# Altium PCB Cuttomized_Industrial_controller.PcbDoc (part 2 of 2)
Units mil, origin at the board's own origin, x right, y up, seen from the top; angles counter-clockwise.
Board outline 5820 x 4455 mil, 2 copper layers (Top Layer, Bottom Layer); 131 components, 106 nets, 448 pads, 121 vias.
Unrouted connection lines stored in the file: 64.
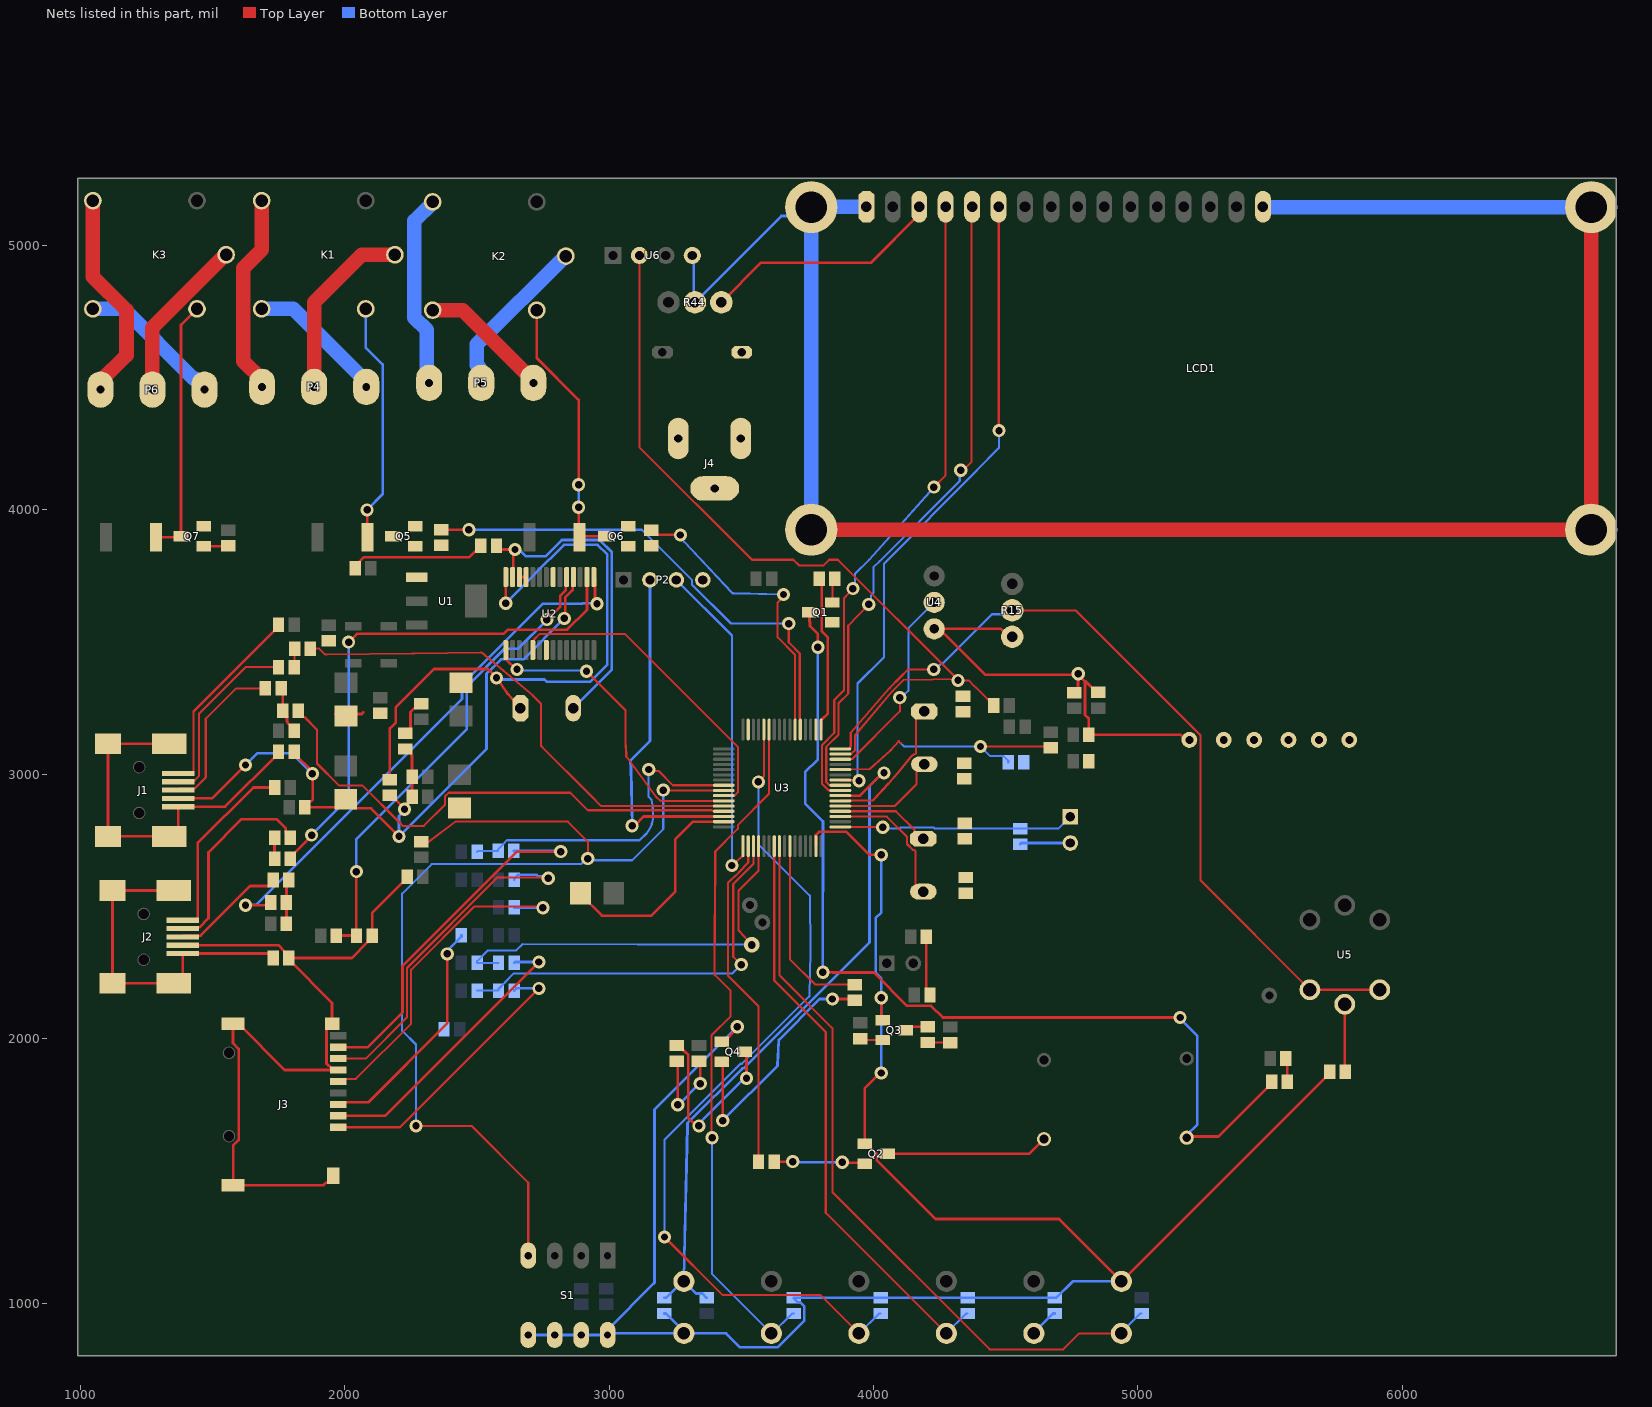
[diagram p2: the nets of this part, all layers, seen from the top]

## Via types
v1: diameter 50, hole 28, Top Layer to Bottom Layer, 121 vias

## Nets (pads, with @x,y where several pads share a name; then routed paths per layer and width w, separated by ;. In a path a pad name is that pad's centre, name@x,y a point inside that pad or via, vN(x,y) a via of type N, cw(c..) or ccw(c..) an arc to the next point about the centre after c; other vN are vias at no path point) (continued)
DATA_1: R23.2 R24.1 U3.40 | length 1235.7
  Top Layer w8: v1(3150,3018) 3154.96,3013.04 3187,3013.04 3241.61,2958.43 U3.40@3434.06,2958.43
  Bottom Layer w8: R23.2@2501.03,2706.67 2504.36,2710 R24.1@2580.47,2710 2580.47,2715.91 2605.87,2741.31 2605.87,2742.53 2613.62,2750.28 3115.28,2750.28 3125,2760 3134.24,2768.49 ccw(c3067.59,2840.99) 3166.05,2843.03 3166.05,2843.12 3165.32,2882.31 3159.98,2904.49 3157.64,2906.83 3148.84,2915.64 3148.84,3016.84 v1(3150,3018)
DATA_2: R19.2 R34.1 U3.51 | length 1536
  Top Layer w8: v1(3500,2280) 3470,2310 3470,2585 3546.26,2661.26 U3.51@3546.26,2728.11
  Bottom Layer w8: R19.2@2501.03,2181.67 R34.1@2581.98,2181.67 2581.98,2187.57 2607.38,2212.98 2607.38,2214.2 2640.29,2247.11 3467.11,2247.11 v1(3500,2280)
DATA_3: pad.2 R20.2 R33.1 U3.52 | length 1576.4
  Top Layer w8: pad.2@3540,2355 3490,2410.61 3490,2560 3565.94,2635.94 U3.52@3565.94,2728.11
  Bottom Layer w8: R33.1@2581.98,2286.67 R20.2@2501.03,2286.67 2501.03,2292.57 2542.57,2334.11 2649.66,2334.11 2672.93,2357.39 pad.2@3540,2355
DC_IN: J4.4 SW7.2
Direction: R37.1 SW4.1 U3.55 | length 2224.7
  Top Layer w8: U3.55@3625,2728.11 3625,2219.95 3820,2024.94 3820,1341.38 SW4.1@4276.2,885.18
  Bottom Layer w8: SW4.1@4276.2,885.18 4276.2,886.01 4350.66,960.47 R37.1@4356.57,960.47
DM: R5.2 U2.16 | length 1987.9
  Top Layer w10: R5.2@1794.09,2680 1794.09,2685.91 1875,2766.81 v1(1875,2770) ; v1(2015,3500) 2046.25,3531.25 2601.65,3531.25 2617.39,3547 2842,3547 2916.77,3621.77 U2.16@2916.77,3745.98
  Bottom Layer w10: v1(1875,2770) 2015,2910 v1(2015,3500)
DM_USB: R4.2 U3.44 | length 1899
  Top Layer w8: R4.2@1870,3475 1903.82,3475 1926.47,3452.34 1932.99,3452.34 2254.46,3457 cw(c2255,3420) 2255.02,3457 2261.16,3457 2264.51,3457 ; 2264.53,3457 2515.08,3460.16 2517.99,3460.16 2711.24,3298.42 2711.51,3298.19 2711.78,3297.92 2740.95,3268.55 2743.27,3266.21 2743.27,3107.53 2748.2,3101.7 2928.47,2921.44 2970.22,2879.69 U3.44@3434.06,2879.69
DP: R9.2 U2.15 | length 2041.4
  Top Layer w10: v1(1625,2505) 1710.94,2505 R9.2@1720.94,2515 ; U2.15@2942.36,3745.98 2946.81,3741.54 2946.81,3708.03 2947.12,3707.72 2947.12,3652.65 v1(2954.77,3645)
  Bottom Layer w10: v1(1625,2505) 1626.26,2506.26 1665,2506.26 2444.04,3285.3 2444.04,3338.62 2750.43,3645 2899.23,3645 2901.58,3647.35 2952.43,3647.35 v1(2954.77,3645)
DP_USB: R6.2 U3.45 | length 1967.6
  Top Layer w8: R6.2@1824.53,3240 1824.53,3234.09 1842.18,3216.44 1848.09,3216.44 1895.54,3168.99 1895.54,3040.81 1979.45,2956.9 2068.1,2956.9 2207.47,2817.53 2220,2805 2300,2805 2379.69,2884.69 2379.69,2916.35 2393.34,2930 2853.85,2930 2920.16,2863.69 3389.3,2863.69 3391.21,2861.78 3394.15,2861.78 3395.2,2860.73 3433.33,2860.73 U3.45@3434.06,2860
EN: LCD1.6 U3.10 | length 2466.8
  Top Layer w8: U3.10@3875,2978.11 3875.73,2977.38 3943.38,2977.38 v1(3945.51,2975.25) ; LCD1.6@4473.35,5146.69 4474.17,5145.87 4474.17,4300.83 v1(4475,4300)
  Bottom Layer w8: v1(3945.51,2975.25) 3940,2980.76 3940,3343.18 4040,3443.18 4040,3796.43 4391.21,4148.88 ccw(c4365,4175) 4391.48,4149.16 4475,4234.75 v1(4475,4300)
Gas: R15.2 U3.16 U5.2 U5.4 | length 3179.8
  Top Layer w8: U3.16@3904.67,3096.22 3914.28,3105.82 3914.28,3153.89 3914.28,3156.94 4059.98,3324.75 cw(c4100,3290) 4062.26,3327.21 4100.66,3366.17 4130.05,3395.55 4186.96,3396.12 v1(4228.01,3396.68) ; R15.2@4525,3620 4764.4,3620 5237,3147.4 5237,2598.83 U5.2@5650.83,2185 U5.4@5915,2185
  Bottom Layer w8: v1(4228.01,3396.68) 4234.37,3396.68 4257.35,3419.66 4263.01,3419.66 4448.61,3605.27 4510.27,3605.27 R15.2@4525,3620
"Gas on/off": R42.1 U3.22 | length 1157
  Top Layer w8: R42.1@3159.57,3923.62 3177.22,3905.97 3269.03,3905.97 v1(3270,3905) ; v1(3660,3680) 3660,3671.96 3637.86,3649.82 3637.86,3518.17 3703.74,3452.29 U3.22@3703.74,3169.06
  Bottom Layer w8: v1(3270,3905) 3270,3893.63 3284.38,3879.26 3464.95,3687.18 3467.29,3684.83 3470.49,3684.75 v1(3660,3680)
GND: BT1.2 C1.1 C2.1 C3.1 C4.1 C6.1 C7.1 C8.1 C9.1 C10.1 C11.1 C12.1 C13.1 C14.1 C15.1 C16.1 C17.1 C18.1 C19.1 C20.1 C21.1 C22.1 C23.1 C24.1 C25.1 C26.1 C27.1 C28.1 D1.2 J1.4 J2.4 J3.6 J3.sh1 J3.sh2 J3.sh3 J3.sh4 J4.2 J4.3 L3.1 L9.1 L10.1 LCD1.1 LCD1.16 P2.4 pad.6 Q1.1 Q2.1 Q3.1 Q4.1 Q5.2 Q6.2 Q7.2 R15.3 R18.1 R35.2 R36.2 R37.2 R38.2 R40.2 R44.2 S1.5 S1.6 S1.7 S1.8 SW1.1 SW6.2 U1.1 U2.7 U2.18 U2.21 U2.25 U2.26 U3.18 U3.31 U3.47 U3.63 U4.3 U6.4 | length 25242
  Top Layer w10: J1.4@1371.22,2908.7 1498.7,2908.7 v1(1625,3035) ; J2.4@1388.11,2353.51 1749.13,2353.51 1772.44,2330.2 1772.44,2327.56 1789.09,2310.91 L10.1@1789.09,2305 ; L9.1@1809.09,3085 1809.09,3079.09 1878.13,3010.06 v1(1878.13,3001.87) ; v1@1880,3001.87 1880,2905 1872.56,2897.56 1866.65,2897.56 1850,2880.91 C14.1@1850,2875 1973.96,2875 C1.1@2004.49,2905.53 2038.86,2871.16 2099.68,2871.16 v1(2205.83,2765) ; J3.sh4@1956.4,1481.65 1956.4,1473.78 1937.77,1455.16 1929.9,1455.16 1920.96,1446.22 J3.sh3@1578.44,1446.22 1578.44,1595.22 1599.32,1616.09 1599.32,1961.39 1577.86,1982.84 1577.86,2055.88 J3.sh2@1578.44,2056.46 1598.13,2056.46 1773.32,1881.26 J3.6@1958.36,1881.26 ; C8.1@1965,3227.99 2064.53,3227.99 2070,3233.46 ; J3.6@1976.08,1881.26 J3.6@1958.36,1881.26 ; C3.1@2040.04,3780 2056.69,3796.65 2056.69,3805.2 2072.06,3820.56 2471.03,3820.56 2492.91,3842.44 2498.82,3842.44 2515.47,3859.09 C21.1@2515.47,3865 ; C20.1@2170.86,2920.47 C20.1@2180.32,2915 ; C20.1@2182.24,2915 2211.94,2885.3 2211.94,2879.14 2215.12,2875.71 2222.14,2868.69 v1(2226.5,2867.32) ; v1@2222.34,2869.85 v1(2226.5,2867.32) ; D1.2@2230,3095.47 2235.9,3095.47 2252.56,3078.82 2252.56,3072.91 2255.04,3070.43 C10.1@2255.04,2990 C9.1@2255.04,2915 2238.39,2892.44 2225.77,2873.28 2224.24,2868.69 v1(2226.5,2867.32) ; C4.1@2236.85,2613.11 2236.85,2607.21 2104.09,2474.45 C6.1@2104.09,2390 2087.44,2373.35 2087.44,2364.8 2027.64,2305 L10.1@1789.09,2305 ; U2.26@2660.87,3745.98 U2.25@2686.46,3745.98 ; v1(2830.63,3589.37) 2834,3592.74 2834,3668.2 2862.45,3696.64 2862.45,3742.84 U2.18@2865.59,3745.98 ; C13.1@2892.01,2550 2892.01,2546.06 2973.07,2465 3160,2465 3250,2555 3250,2753.74 3316.89,2820.63 U3.47@3434.06,2820.63 ; Q4.1@3427.19,1987.95 3435.06,1987.95 3485,2037.89 v1(3485,2045) ; U3.63@3782.48,2728.11 3782.83,2728.46 3782.83,2770.94 3794.34,2782.45 3831.33,2782.45 3831.74,2782.04 3897.96,2782.04 3985,2695 v1(4030,2695) ; v1(4030,1870) 4025,1870 3966.69,1811.69 Q2.1@3966.69,1602.4 3974.57,1602.4 4012.75,1564.22 4012.75,1539.93 4234.98,1317.7 4702.58,1317.7 SW6.2@4938.2,1082.08 4938.46,1082.08 5725.47,1869.09 R18.1@5725.47,1875 ; v1(4030,2155) 4030,2074.8 Q3.1@4035,2069.8 ; C22.1@4199.53,2385 4199.53,2179.53 R40.2@4214.06,2165 ; U4.3@4230,3550 U4.3@4248.94,3550 ; R15.3@4525,3520 4511.97,3520 4481.97,3550 U4.3@4248.94,3550 ; C25.1@4760,3309.06 4773.71,3322.77 v1@4773.71,3376.29 ; v1(4775,3380) v1@4772.5,3377.5 ; 4801.81,3351.81 4844.09,3309.53 C24.1@4850,3309.53 ; pad.6@5195,3130 5181.47,3130 5161.47,3150 C23.1@4815,3150 4815,3210 4800.56,3224.44 4800.56,3338.92 4800,3339.48 4800,3350 v1@4773.71,3376.29 ; L10.1@1789.09,2305 1789.09,2299.09 1952.46,2135.73 J3.sh1@1952.46,2056.46 1950.21,2056.46 1931.58,2037.83 1931.58,1905.4 1939.2,1897.79 1941.84,1897.79 J3.6@1958.36,1881.26 ; U4.3@4248.94,3550 4268.23,3530.71 4268.49,3530.71 4422.65,3376.55 4771.55,3376.55 v1@4772.5,3377.5 ; v1@4772.5,3377.5 v1@4773.71,3376.29
  Top Layer w55: LCD1.1@3765,3925 LCD1.1@6715,3925 LCD1.1@6715,5145
  Bottom Layer w10: v1(1625,3035) 1670,3080 1800,3080 v1(1878.13,3001.87) ; v1(2226.5,2867.32) 2226.5,2862.13 2205.83,2841.46 v1(2205.83,2765) 2536.6,3095.77 2536.6,3380.27 2558.86,3402.53 2590.9,3434.56 2675.82,3434.56 v1(2830.63,3589.37) ; S1.5@2694.57,879.21 S1.6@2794.57,879.21 S1.7@2894.57,879.21 S1.8@2994.57,879.21 ; C18.1@3209.57,960.47 3215.47,960.47 3283.2,892.74 SW1.1@3283.2,885.18 ; U6.4@3315,4962.4 3320,4957.4 3320,4790 R44.2@3325,4785 3651.57,5111.57 3731.57,5111.57 LCD1.1@3765,5145 ; v1(3485,2045) 3172,1732 3172,1076.33 3169.07,1073.4 2994.57,898.9 S1.8@2994.57,879.21 ; v1(4030,1870) v1(4030,2155) 4030,2227.89 4008.27,2249.62 4008.27,2456.03 4030,2477.76 v1(4030,2695) ; C27.1@4555,2735.47 4559.53,2740 BT1.2@4745.2,2740 ; SW6.2@4938.2,1082.08 4754.02,1082.08 4691.47,1019.53 R38.2@4685.57,1019.53 R37.2@4356.57,1019.53 R36.2@4027.57,1019.53 R35.2@3698.57,1019.53 3715.22,1002.87 3723.76,1002.87 3739.13,987.51 3739.13,933.43 3637.87,832.18 3495.65,832.18 3442.65,885.18 SW1.1@3283.2,885.18 ; LCD1.16@5473.35,5146.69 LCD1.16@5475.04,5145 ; S1.8@2994.57,879.21 3000.53,885.18 SW1.1@3283.2,885.18
  Bottom Layer w55: LCD1.1@3765,3925 LCD1.1@3765,5145 3765.85,5145.85 3972.5,5145.85 LCD1.1@3973.35,5146.69 ; LCD1.16@5475.04,5145 LCD1.1@6715,5145
GND_A: C5.1 L3.2 U3.12 | length 1141.8
  Top Layer w8: U3.12@3875,3017.48 3910.43,3017.48 3986.65,3019.73 ; 4103.57,3117.58 4095.99,3125.15 ; v1(4405,3105) 4665,3105 C5.1@4670,3100 ; 3986.65,3019.73 4063.42,3088.84 ; 3986.65,3019.73 4063.42,3088.84 ; 4063.42,3088.84 ccw(c4038.66,3116.34) 4066.32,3091.76 cw(c4038.66,3116.34) 4063.42,3088.84 ; 4063.42,3088.84 4095.99,3125.15 ; 4063.42,3088.84 4095.99,3125.15
  Bottom Layer w8: 4103.57,3117.58 4116.14,3105 v1(4405,3105) 4441.44,3068.56 4492.35,3068.56 4510,3050.91 L3.2@4510,3045
Heater: R30.2 S1.4 U3.41 | length 3912.7
  Top Layer w8: v1(2270,1670) 2480,1670 2694.57,1455.43 S1.4@2694.57,1179.21 ; R30.2@2290,2744.53 2313.56,2741.91 2314.01,2741.91 2419.07,2820.64 2844.01,2820.64 2920,2744.64 v1(2920,2681) ; v1(3205,2940) 3206.26,2938.74 U3.41@3434.06,2938.74
  Bottom Layer w8: v1(2270,1670) 2270,1977.67 2217.7,2029.98 2217.7,2548.57 2329.12,2660 2894.31,2660 2909.31,2675 v1@2920,2675 ; v1(2920,2681) v1@2920,2675 ; v1(3205,2940) 3205,2792.67 3087.33,2675 v1@2920,2675
"Heater on/off": R41.1 U3.21 | length 1891.4
  Top Layer w8: R41.1@2365,3924.53 2365.47,3925 v1(2470,3925) ; v1(3680,3570) 3680,3498.65 3721.65,3457.01 3721.65,3208.96 3722.7,3207.91 3722.7,3169.78 U3.21@3723.43,3169.06
  Bottom Layer w8: v1(2470,3925) 3123.73,3925 3313.47,3735.26 3313.47,3717.8 3461.27,3570 v1(3680,3570)
Manual: R17.1 U3.58 | length 713.2
  Top Layer w8: U3.58@3684.06,2728.11 3684.06,2300.94 3780.31,2204.69 3929.37,2204.69 R17.1@3930,2204.06
NetC6_2: C6.2 R3.2 U2.19 | length 1791.4
  Top Layer w10: R3.2@1969.09,2390 C6.2@2045.04,2390 2044.63,2390.41 v1(2044.63,2632.03) ; v1(2765,3585) 2765.91,3585 2816,3635.09 2816,3675.65 2836.86,3696.51 2836.86,3742.84 U2.19@2840,3745.98
  Bottom Layer w10: v1(2044.63,2632.03) 2044.63,2754.28 2462.04,3171.69 2462.04,3331.16 2605.58,3474.7 2655.61,3474.7 2765,3584.09 v1(2765,3585)
NetC20_2: C20.2 U2.28 Y1.1 | length 2413.1
  Top Layer w10: C20.2@2170.86,2979.53 2170.86,3173.28 2193.56,3195.98 2193.56,3253.56 2338.35,3398.35 2541.65,3398.35 2549.06,3390.94 v1(2574.6,3364.53) ; v1@2575.09,3364.86 v1(2574.6,3364.53) ; v1(2609.69,3647) U2.28@2609.69,3745.98 ; Y1.1@2647.07,3230 2640,3278.04 2615.69,3305.3 v1(2574.6,3364.53) ; Y1.1@2667.07,3285 Y1.1@2685,3230
  Bottom Layer w10: v1(2574.6,3364.53) 2580.57,3358.56 2755.55,3358.56 2764.78,3349.33 2928.07,3349.33 2992.77,3414.03 2992.77,3832.23 2957,3868 2829.26,3868 2721.01,3759.75 2721.01,3758.32 v1(2609.69,3647)
NetC21_2: C21.2 U2.27 Y1.2 | length 1237.7
  Top Layer w10: C21.2@2589.53,3850 v1(2644.44,3850) 2638.42,3843.97 2638.42,3749.13 U2.27@2635.28,3745.98
  Bottom Layer w10: v1(2644.44,3850) 2652.1,3842.35 2667.65,3842.35 2685,3825 2760.8,3825 2821.8,3886 2964.46,3886 3010.77,3839.68 3010.77,3395.77 2894.57,3279.57 2888.1,3279.57 2865,3256.47 Y1.2@2865,3250
NetD1_1: D1.1 R1.1 | length 144.3
  Top Layer w10: D1.1@2230,3154.53 2232.65,3154.53 2249.31,3171.18 2249.31,3235.5 2264.67,3250.87 2273.21,3250.87 R1.1@2289.87,3267.52
NetD2_1: D2.1 R2.2 | length 90.3
  Top Layer w10: R2.2@5559.53,1925 5565,1919.53 D2.1@5565,1836.94
NetD2_2: D2.2 LS1.N Q1.3 | length 3755.2
  Top Layer w10: Q1.3@3758.39,3612.4 3758.39,3577.72 3760.11,3575.99 3760.11,3559.89 3790,3530 v1(3790,3480) ; v1(3808.91,2251.47) 3845.63,2250 3853.91,2250 4002.4,2250 4127.96,2124.44 4218.14,2124.44 4262.58,2080 v1@5145,2080 ; LS1.N@5180,1624.61 LS1.N@5185,1624.61 ; LS1.N@5185,1630 5304.91,1630 5505.94,1831.03 D2.2@5505.94,1836.94
  Bottom Layer w10: v1(3790,3480) 3790,3056.26 3742,3008.26 3742,2889.26 3806.42,2824.84 3809.35,2821.91 3809.35,2813.63 3808.6,2296.53 3808.6,2288.24 v1(3808.91,2251.47) ; v1@5145,2080 5150,2085 5225,2010 5225,1675 5182.89,1632.89 LS1.N@5180,1630
  other v1: 5160,2080
NetD5_1: D5.1 R13.2 | length 85.2
  Top Layer w8: D5.1@4205,1985.47 4289.53,1985.47 R13.2@4290,1985
NetD5_2: D5.2 Q3.3 | length 88.4
  Top Layer w10: Q3.3@4121.61,2032.4 4133.74,2044.53 D5.2@4205,2044.53
NetD6_1: D6.1 R14.2 | length 372.1
  Top Layer w10: D6.1@3255.5,1915.12 3260,1910.61 v1(3260,1750) ; R14.2@3340.5,1915.12 3345,1910.61 v1(3345,1830)
  Bottom Layer w10: v1(3260,1750) 3262.5,1750 3342.5,1830 v1(3345,1830)
NetD6_2: D6.2 Q4.3 | length 714.4
  Top Layer w10: D6.2@3255.5,1974.17 3261.4,1974.17 3280.58,1955 3282.64,1955 3287.86,1949.77 3288.44,1949.77 3299.94,1938.27 3299.94,1698.58 3307.01,1691.51 3307.67,1691.51 3329.18,1670 v1(3340,1670) ; Q4.3@3513.8,1950.55 3520,1944.36 v1(3520,1850)
  Bottom Layer w10: v1(3340,1670) 3340,1680 3510,1850 v1(3520,1850)
NetD7_A: D7.A K1.5 Q5.3 | length 914.8
  Top Layer w10: v1(2085,4000) 2085,3898.12 D7.A@2086.07,3897.05
  Bottom Layer w10: K1.5@2079.76,4760.27 2079.76,4614.36 2144.06,4550.06 2144.06,4059.06 v1(2085,4000)
NetD8_A: D8.A K2.5 Q6.3 | length 1023.9
  Top Layer w10: K2.5@2726.73,4755.27 2726.73,4574.63 2885,4416.37 v1(2885,4095) ; v1(2885,4010) 2885,3901.1 D8.A@2889.06,3897.05 2892.01,3900 Q6.3@2986.26,3900
  Bottom Layer w10: v1(2885,4010) v1(2885,4095)
NetD9_A: D9.A K3.5 Q7.3 | length 981.7
  Top Layer w10: D9.A@1286.07,3897.05 1378.31,3897.05 Q7.3@1381.26,3900 1381.26,4699.8 K3.5@1441.73,4760.27
NetJ1_1: J1.1 L2.2 | length 748.7
  Top Layer w8: J1.1@1371.22,3003.19 1422.4,3003.19 1428.24,3009.03 1428.24,3237.3 1750.04,3559.09 L2.2@1750.04,3565
NetJ1_2: J1.2 L5.2 | length 696.5
  Top Layer w8: J1.2@1371.22,2971.69 1377.06,2977.53 1433.4,2977.53 1450,2994.13 1450,3230 1625,3405 L5.2@1750.04,3405
NetJ1_3: J1.3 L7.2 | length 618.9
  Top Layer w8: J1.3@1371.22,2940.19 1377.06,2946.03 1433.4,2946.03 1475,2987.63 1475,3210 1590,3325 L7.2@1700.47,3325
NetJ1_5: J1.5 L9.2 | length 1409.6
  Top Layer w10: J1.5@1337.28,3115.39 J1.5@1105,3115.39 J1.5@1105,2765 J1.5@1337.28,2765 1371.22,2798.94 J1.5@1371.22,2877.2 1548.15,2877.2 1750.04,3079.09 L9.2@1750.04,3085
NetJ2_1: J2.1 L4.2 | length 722.6
  Top Layer w10: J2.1@1388.11,2448 1439.29,2448 1444.13,2452.84 1444.13,2739.13 1655,2950 L4.2@1735.04,2950
NetJ2_2: J2.2 L6.2 | length 763.3
  Top Layer w10: J2.2@1388.11,2416.5 1392.95,2421.34 1450.7,2421.34 1485,2455.64 1485,2705 1610,2830 1742.89,2830 1777.44,2795.45 1777.44,2776.65 L6.2@1794.09,2760
NetJ2_3: J2.3 L8.2 | length 434.4
  Top Layer w10: J2.3@1388.11,2385 1392.95,2389.84 1454.84,2389.84 1642.44,2577.44 1713.39,2577.44 1730.04,2594.09 L8.2@1730.04,2600
NetJ2_5: J2.5 L10.2 | length 1290.4
  Top Layer w10: J2.5@1354.17,2560.2 J2.5@1121.89,2560.2 J2.5@1121.89,2209.81 J2.5@1354.17,2209.81 1388.11,2243.75 J2.5@1388.11,2322.01 1713.39,2322.01 1730.04,2305.36 L10.2@1730.04,2305
NetJ3_1: J3.1 R34.2 | length 1073.9
  Top Layer w8: J3.1@1976.08,1664.72 2209.72,1664.72 v1(2735,2190)
  Bottom Layer w10: R34.2@2641.03,2181.67 2649.36,2190 v1(2735,2190)
NetJ3_2: J3.2 R33.2 | length 1095.3
  Top Layer w10: J3.2@1976.08,1708.03 2153.03,1708.03 v1(2735,2290)
  Bottom Layer w10: R33.2@2641.03,2286.67 2644.36,2290 v1(2735,2290)
NetJ3_3: J3.3 R31.2 | length 895
  Top Layer w10: J3.3@1976.08,1751.34 1994.47,1751.34 2002.58,1759.44 2089.44,1759.44 2387.91,2057.91 v1(2387.91,2320.4)
  Bottom Layer w10: v1(2387.91,2320.4) 2395.56,2328.05 2395.56,2339.35 2441.98,2385.76 R31.2@2441.98,2391.67
NetJ3_5: J3.5 R26.2 | length 1279.4
  Top Layer w8: J3.5@1976.08,1837.95 1985.86,1847.73 2042.73,1847.73 2251.75,2056.75 2251.75,2260.79 2490.96,2500 2745,2500 v1(2750,2495)
  Bottom Layer w10: R26.2@2641.03,2496.67 2642.7,2495 v1(2750,2495)
NetJ3_7: J3.7 R25.2 | length 1331.4
  Top Layer w8: J3.7@1976.08,1924.57 2079.57,1924.57 2235.75,2080.75 2235.75,2267.42 2578.33,2610 2767,2610 v1(2770,2607)
  Bottom Layer w10: R25.2@2641.03,2601.67 2641.03,2603.35 2657.69,2620 2725,2620 2730.35,2614.65 2762.35,2614.65 v1(2770,2607)
NetJ3_8: J3.8 R24.2 | length 1434.7
  Top Layer w10: J3.8@1976.08,1967.87 2087.87,1967.87 2218.75,2098.75 2218.75,2274.46 2651.82,2707.53 v1(2817.53,2707.53)
  Bottom Layer w10: R24.2@2639.53,2710 2820,2710 v1(2817.53,2707.53)
NetK1_1: K1.1 P4.2 | length 699.6
  Top Layer w55: P4.2@1885,4465 1885,4785 2065,4965 K1.1@2190,4965
NetK1_2: K1.2 P4.1 | length 762.7
  Top Layer w10: P4.1@1688.15,4465 P4.1@1688.15,4491.85
  Top Layer w55: K1.2@1686.06,5169.72 1686.06,4983.58 1617.1,4914.62 1617.1,4562.9 P4.1@1688.15,4491.85
NetK1_3: K1.3 P4.3 | length 529.6
  Bottom Layer w10: P4.3@2081.85,4465 P4.3@2081.85,4484.69
  Bottom Layer w55: K1.3@1686.06,4760.27 1806.26,4760.27 P4.3@2081.85,4484.69
NetK2_1: K2.1 P5.2 | length 628.3
  Bottom Layer w55: P5.2@2516.85,4480 2508.54,4488.31 2508.54,4538.7 2500,4547.24 2500,4626.07 2833.93,4960 K2.1@2836.97,4960
NetK2_2: K2.2 P5.1 | length 736.5
  Bottom Layer w55: P5.1@2320,4480 2311.69,4488.31 2311.69,4538.7 2310,4540.39 2310,4680.78 2264.07,4726.71 2264.07,5092.53 2333.03,5161.5 K2.2@2333.03,5164.72
NetK2_3: K2.3 P5.3 | length 499.3
  Top Layer w55: K2.3@2333.03,4755.27 2446.36,4755.27 2713.7,4487.93 P5.3@2713.7,4480
NetK3_1: K3.1 P6.2 | length 627.3
  Top Layer w55: P6.2@1273.15,4455 1273.15,4689.22 1548.93,4965 K3.1@1551.97,4965
NetK3_2: K3.2 P6.1 | length 808.2
  Top Layer w55: K3.2@1048.03,5169.72 1048.03,4881.3 1175,4754.33 1175,4585.14 1076.3,4486.44 P6.1@1076.3,4455
NetK3_3: K3.3 P6.3 | length 558.1
  Bottom Layer w10: P6.3@1470,4455 P6.3@1470,4460
  Bottom Layer w55: K3.3@1048.03,4760.27 1164.73,4760.27 1428.6,4496.4 1436.54,4496.4 1470,4462.93 P6.3@1470,4455
NetL5_1: L5.1 R4.1 | length 70.8
  Top Layer w8: L5.1@1809.09,3405 1810.94,3406.85 R4.1@1810.94,3475
NetL6_1: L6.1 R5.1 | length 80
  Top Layer w10: R5.1@1735.04,2680 L6.1@1735.04,2760
NetL7_1: L7.1 R6.1 R10.1 | length 181.4
  Top Layer w10: L7.1@1759.53,3325 1765.47,3319.05 R6.1@1765.47,3240 1782.13,3223.35 1782.13,3199.68 1784.69,3197.11 1784.69,3194.48 1809.09,3170.07 R10.1@1809.09,3164.17
NetL8_1: L8.1 R9.1 R12.1 | length 169
  Top Layer w10: R12.1@1779.53,2435 1780,2435.47 R9.1@1780,2515 1780,2590.91 L8.1@1789.09,2600
NetLCD1_3: LCD1.3 R44.3 | length 915.7
  Top Layer w10: R44.3@3425,4785 3575.24,4935.24 3991.89,4935.24 4173.35,5116.69 LCD1.3@4173.35,5146.69
NetLS2_N: LS2.N Q2.3 | length 614.5
  Top Layer w10: Q2.3@4053.31,1565 4590,1565 LS2.N@4645,1620
NetQ1_2: Q1.2 R7.1 | length 94.1
  Top Layer w8: Q1.2@3845,3649.8 3845,3730.47 R7.1@3854.53,3740
NetQ2_2: Q2.2 R8.1 | length 365.2
  Top Layer w10: R8.1@3624.53,1535 v1(3695,1535) ; v1(3882.5,1532.5) 3885,1530 3964.29,1530 Q2.2@3966.69,1527.6
  Bottom Layer w10: v1@3675,1535 3677.5,1532.5 v1(3882.5,1532.5)
NetQ3_2: Q3.2 R16.2 | length 87.3
  Top Layer w8: R16.2@3950,2000.47 3955.47,1995 Q3.2@4035,1995
NetQ4_2: Q4.2 R17.2 | length 969.6
  Top Layer w10: Q4.2@3427.19,1913.15 3430,1910.34 v1(3430,1690) ; v1(3845,2150) 3925,2150 R17.2@3930,2145
  Bottom Layer w10: v1(3430,1690) 3637.03,1897.03 3642.18,1995.56 3796.61,2150 v1(3845,2150)
NetQ5_1: Q5.1 R41.2
NetQ6_1: Q6.1 R42.2
NetQ7_1: Q7.1 R43.2 | length 92.5
  Top Layer w10: Q7.1@1467.87,3862.6 1557.6,3862.6 R43.2@1559.57,3864.57
NetR18_2: R18.2 U5.6 | length 255.7
  Top Layer w10: U5.6@5782.91,2130.08 5782.91,1876.61 R18.2@5784.53,1875
OSC_CLOCK_IN: C16.2 U3.3 Y3.2 | length 523.3
  Top Layer w8: U3.3@3875,2840.32 3875.73,2839.59 4050.41,2839.59 4127,2763 4127,2736.03 4149.03,2714 4154.36,2714 4159.05,2709.31 4159.05,2580.02 4183.07,2556 Y3.2@4189,2556
OSC_CLOCK_OUT: C19.2 U3.4 Y3.1 | length 361.2
  Top Layer w8: U3.4@3875,2860 4085,2860 4156.01,2788.99 4156.01,2782 4182.01,2756 Y3.1@4189,2756
OSC_IN: C15.2 U3.5 Y2.2 | length 413.1
  Top Layer w8: U3.5@3875,2879.69 4079.69,2879.69 4162.87,2962.87 4162.87,3013.78 4186.89,3037.8 Y2.2@4192.82,3037.8
OSC_OUT: C17.2 U3.6 Y2.1 | length 568.3
  Top Layer w8: U3.6@3875,2899.37 3875.73,2900.1 3997.69,2900.1 4002.38,2904.79 4057.34,2965.07 ccw(c4030,2990) 4058.33,2966.2 ; 4058.38,2966.27 cw(c4030,2990) 4058.33,2966.2 ; 4093.79,3006.76 cw(c4065,3030) 4092.84,3005.63 ; 4142.22,3066.57 ccw(c4172.82,3037.8) 4140.75,3064.92 ccw(c4172.82,3037.8) 4140.59,3064.74 ; 4161.56,3082.03 cw(c4153.82,3084.05) 4156.9,3076.67 ; Y2.1@4192.82,3237.8 4187.82,3237.8 4161.82,3211.8 4161.82,3083.02 4156.9,3076.67 ; 4058.33,2966.2 4092.84,3005.63 ; 4092.84,3005.63 4140.14,3064.18 ; 4140.14,3064.18 cw(c4172.82,3037.8) 4140.59,3064.74 ; 4140.14,3064.18 cw(c4172.82,3037.8) 4140.59,3064.74 ; 4140.14,3064.18 4140.59,3064.74 ; 4156.9,3076.67 ccw(c4172.82,3037.8) 4142.27,3066.63 cw(c4172.82,3037.8) 4156.9,3076.67
PWM_Alarm: R8.2 U3.50 | length 1295.3
  Top Layer w8: U3.50@3526.57,2728.11 3526.57,2666.26 3491.88,2629.58 cw(c3465,2655) 3490.4,2628.1 3454.69,2594.37 3450,2589.68 3450,2586.37 3450,2238.45 3565.47,2122.98 R8.2@3565.47,1535 3558.38,1528.77 3555.37,1528.77 3552.05,1528.77 3549.71,1531.11 3547.97,1532.85 R8.2@3547.88,1533.95
PWM_Gas: R7.2 U3.17 | length 595.1
  Top Layer w10: R7.2@3795.47,3740 3804.44,3731.03 3804.44,3541.01 3828,3517.46 3828,3230.32 3802.76,3205.08 3802.76,3169.65 U3.17@3802.17,3169.06
RESET: C18.2 R11.1 SW1.2 U3.7 | length 2649.1
  Top Layer w10: U3.7@3875,2919.06 3949.06,2919.06 4035,3005 v1(4040,3005)
  Bottom Layer w10: C18.2@3209.57,1019.53 3215.47,1019.53 3278.02,1082.08 SW1.2@3283.2,1082.08 ; R11.1@3369.57,1019.53 3352.91,1036.18 3329.1,1036.18 SW1.2@3283.2,1082.08 ; v1(4040,3005) 4035,3005 3985,2955 3985,2363.84 3509.16,1888 3504.26,1888 3296.95,1680.69 3296.95,1675.91 3296.95,1675.67 3296.86,1671.79 3283.2,1090.36 SW1.2@3283.2,1082.08
"Reset Clock / Date / Alarm": R39.1 SW6.1 U3.56 | length 2866.1
  Top Layer w8: U3.56@3644.69,2728.11 3644.69,2240.32 3845,2040 3845,1420 4440,825 4718.02,825 4778.19,885.18 SW6.1@4938.2,885.18
  Bottom Layer w8: SW6.1@4938.2,885.18 4938.2,890.01 5008.66,960.47 R39.1@5014.57,960.47
RS: LCD1.4 U3.8 | length 2447.2
  Top Layer w8: U3.8@3875,2938.74 3874.27,2939.47 3830.26,2939.47 3805.66,2964.07 3805.66,3110.26 3852,3156.6 3852,3280.99 3889,3317.99 3889,3665.69 v1(3922.34,3702.34) ; v1(4228.84,4086.16) 4229.14,4086.47 4273.35,4130.67 LCD1.4@4273.35,5146.69
  Bottom Layer w8: v1(3922.34,3702.34) 3930,3710 3930,3757.63 3983.84,3811.47 3984.15,3811.8 v1(4228.84,4086.16)
RW: LCD1.5 U3.9 | length 2467.8
  Top Layer w8: U3.9@3875,2958.43 3874.27,2959.15 3833.2,2959.15 3821.66,2970.69 3821.66,3103.64 3868,3149.98 3868,3268 3905,3305 3905,3561.69 v1(3982.34,3642.34) ; v1(4330,4150) 4340,4150 4371.67,4181.67 4371.67,5145.02 LCD1.5@4373.35,5146.69
  Bottom Layer w8: v1(3982.34,3642.34) 3990.38,3650.38 3990.38,3675.72 4000,3685.34 4000,3782.37 4023.91,3806.28 4326.63,4109 4326.63,4146.63 v1(4330,4150)
RXD_STM32: U2.1 U3.43 | length 1191.7
  Top Layer w8: U2.1@2609.69,3470 2613.83,3437.32 2613.83,3430.4 2623.62,3420.6 v1(2652.12,3396.56) ; v1(2915,3390) 3062,3243 3062,3227.64 3062,3227.56 3063,3124.64 ccw(c3100,3125) 3063.03,3123.45 3065.11,3074.05 cw(c3028.14,3072.5) 3064.98,3069.05 3064.98,3067.3 3175.24,2918.02 ccw(c3205,2940) 3181.94,2911.06 3196.62,2899.37 U3.43@3434.06,2899.37
  Bottom Layer w8: v1(2652.12,3396.56) 2655.68,3393 2912,3393 v1(2915,3390)
"Set Clock / Date / Alarm": R36.1 SW3.1 U3.28 | length 3238.1
  Top Layer w8: v1(3210,1250) 3429.92,1030.08 3800.3,1030.08 SW3.1@3945.2,885.18 ; v1(3565,2971.07) 3585.63,2991.7 U3.28@3585.63,3169.06
  Bottom Layer w8: v1(3210,1250) 3210,1617.78 3497.22,1905 3502.12,1905 3755.39,2158.27 3757.65,2160.53 3757.73,2163.72 3761.99,2329.05 ccw(c3725,2330) 3762,2330.34 3760.11,2536.6 3760.11,2540.05 3757.76,2542.39 3565,2735.15 v1(3565,2971.07) ; SW3.1@3945.2,885.18 3946.37,885.18 4021.66,960.47 R36.1@4027.57,960.47
"Start Clock / Date / Alarm": R38.1 SW5.1 | length 111.2
  Bottom Layer w10: SW5.1@4607.2,885.18 4607.2,888.01 4679.66,960.47 R38.1@4685.57,960.47
"Start Setting Clock / Date / Alarm": R35.1 SW2.1 U3.27 | length 2632.8
  Top Layer w8: v1(3390,1625) 3387.63,1627.37 3387.63,2012.61 3460,2084.98 3460,2180.75 3401.34,2239.4 3399,2241.75 3399,2248.38 3402,2689.75 ccw(c3365,2690) 3402,2690 3402,2708.13 3487.39,2793.53 3487.39,2807.77 3605.32,2925.69 U3.27@3605.32,3169.06
  Bottom Layer w8: v1(3390,1625) 3390,1109.38 SW2.1@3614.2,885.18 3617.37,885.18 3692.66,960.47 R35.1@3698.57,960.47
SWCLK: P2.3 U3.49 | length 1258.8
  Top Layer w8: v1(3465,2655) 3502.2,2687.99 3506.89,2692.68 U3.49@3506.89,2728.11
  Bottom Layer w8: P2.3@3255,3735 3465,3525 v1(3465,2655)
SWDIO: P2.2 U3.46 | length 1322.1
  Top Layer w10: v1(3087.45,2805) 3095.54,2805 3130.86,2840.31 U3.46@3434.06,2840.31
  Bottom Layer w10: v1(3087.45,2805) 3082.97,3030.65 3080.93,3044.04 3080.93,3052.19 3155,3126.26 P2.2@3155,3735
"Temp / Hum_Digital": R32.1 U3.15 U6.2 | length 3124.9
  Top Layer w8: U6.2@3115,4962.4 3115,4237.37 3540.81,3811.56 3696.82,3811.56 3718.38,3790 3811.62,3790 3833.18,3811.56 3865.45,3811.56 4306.65,3370.37 4308.44,3369.77 4331.49,3362.07 4332.7,3361.01 v1@4333.9,3359.96 ; U3.15@3875,3076.54 3875.73,3077.27 3916.8,3077.27 3930.28,3090.74 3930.28,3144.33 3930.28,3147.27 3932.18,3149.51 4071.79,3313.95 cw(c4100,3290) 4073.67,3315.99 4114.25,3357.11 v1@4333.9,3359.96 ; v1(4320,3355) v1@4328.94,3355 ; R32.1@4455.47,3260 4455.47,3265.91 4437.82,3283.56 4431.91,3283.56 4386.73,3328.74 4382.05,3333.42 4360.47,3355 v1@4328.94,3355 ; v1@4328.94,3355 v1@4333.9,3359.96
Temp_Analog: U3.14 U4.2 | length 769.7
  Top Layer w8: U3.14@3875,3056.85 3875.73,3057.58 3919.74,3057.58 4100,3237.84 v1(4100,3290)
  Bottom Layer w8: v1(4100,3290) 4106.28,3290 4132.13,3315.85 4132.13,3552.13 U4.2@4230,3650
TXD_STM32: U2.5 U3.42 | length 1228.3
  Top Layer w8: U2.5@2712.05,3470 2712.05,3499.2 2716.19,3503.35 2716.19,3509.61 2736.58,3530 3061.03,3530 3487.39,3103.64 3487.39,2931.32 3475.85,2919.78 3434.78,2919.78 U3.42@3434.06,2919.06
VBAT: BT1.1 C27.2 U3.1 | length 894.6
  Top Layer w8: U3.1@3875,2800.94 3875.47,2800.47 4034.53,2800.47 v1(4035,2800)
  Bottom Layer w8: v1(4035,2800) 4040.47,2794.53 4099.98,2794.53 4103.45,2798 4228.97,2798 4232.44,2794.53 C27.2@4555,2794.53 4699.72,2794.53 BT1.1@4745.2,2840
pads on no net: J1. J2. J3. J3.9 LCD1.7 LCD1.8 LCD1.9 LCD1.10 U2.2 U2.3 U2.6 U2.9 U2.10 U2.11 U2.12 U2.13 U2.14 U2.22 U2.23 U2.24 U3.2 U3.11 U3.24 U3.25 U3.33 U3.34 U3.35 U3.36 U3.37 U3.38 U6.3

## Polygon pours and split planes (outlines as drawn)
3V3 on Top Layer "3V3_L01_P000" (solid, remove dead copper, pour order 0): 6805,5255 990,5255 990,805 995,800 6810,800
GND on Bottom Layer "GND_L02_P001" (solid, remove dead copper, pour order 1): 6810,5255 6805,5250 990,5250 990,805 995,800 6810,800

## Text inside footprints (layer, text, board x,y; h text height)
BT1: Top Overlay "+" at 4722.48,2934.49 h30 r270
LCD1: Top Overlay "LCD 16X2-A" at 3935,3905 h30; Top Overlay "16" at 5453.35,4996.69 h30; Top Overlay "1" at 3973.35,4996.69 h30; Top Overlay "14" at 5253.35,4986.69 h30
P4: Top Overlay "1 2 3" at 1660,4125 h30
P5: Top Overlay "1 2 3" at 2291.85,4140 h30
P6: Top Overlay "1 2 3" at 1048.15,4115 h30
S1: Top Overlay "ON" at 3059.57,939.21 h30 r180; Top Overlay "1" at 2997.56,1128.45 h30 r180; Top Overlay "2" at 2906.61,1128.45 h30 r180; Top Overlay "3" at 2807.4,1128.45 h30 r180; Top Overlay "4" at 2709.37,1128.45 h30 r180